# Altium PCB EE_smallOB_BW_v1.0.PcbDoc (part 2 of 4)
Units mil, origin at the board's own origin, x right, y up, seen from the top; angles counter-clockwise.
Board outline 1388 x 1586.96 mil, 4 copper layers (Top Layer, Layer 1, Layer 2, Bottom Layer), stack 37.371 mil thick; 116 components, 102 nets, 640 pads, 211 vias.
Unrouted connection lines stored in the file: 1.
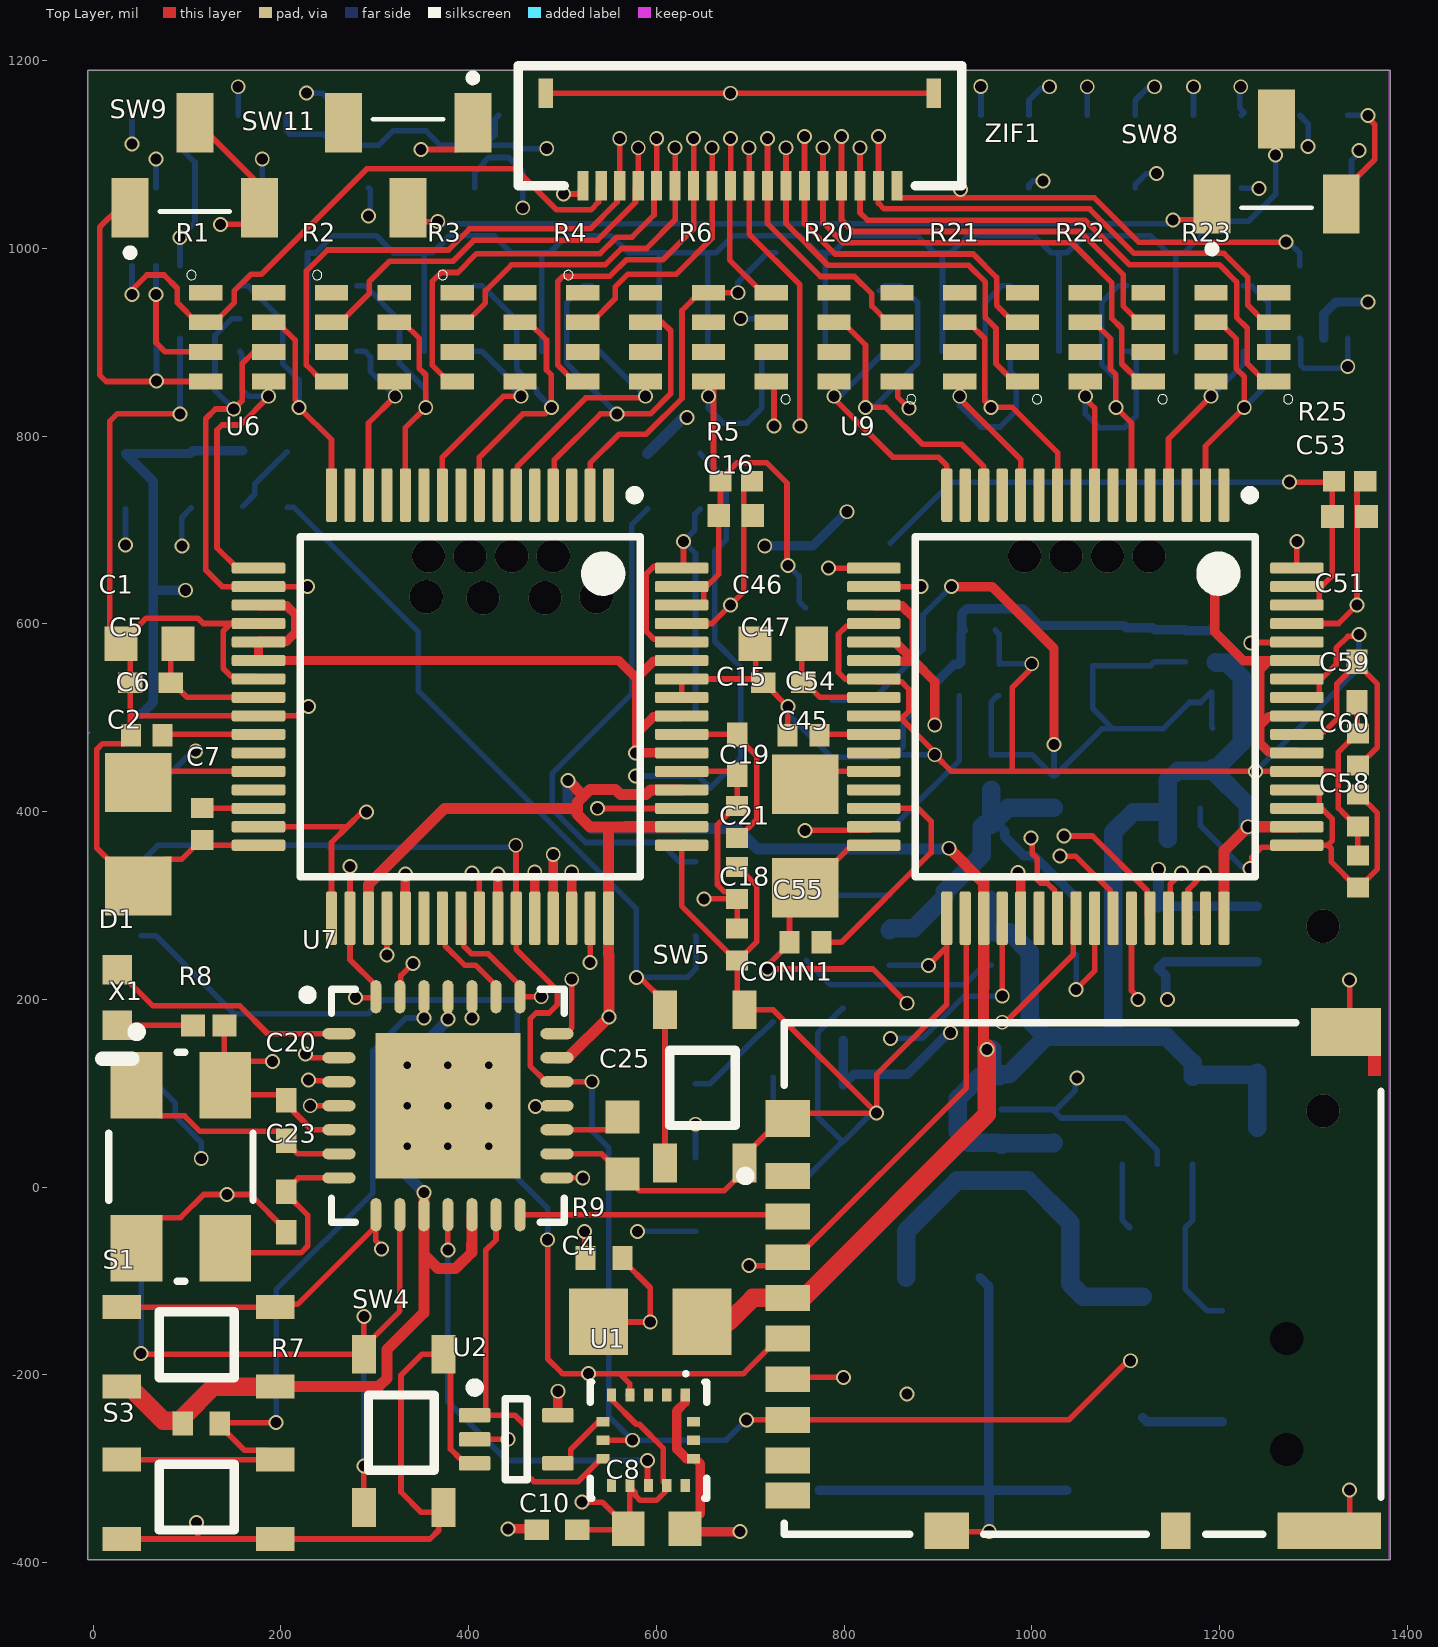
[diagram p0: Top Layer view]

## Part data (continued)
R1 R2 R3 R4 R6 R20 R21 R22 R23: "BOURNS         CAY16-2201F4LF             RESISTOR, ARRAY-4, 2.2KOHM, 5%, SMD", Case/Package=1206, Case Code (Metric)=3216, Manufacturer 1=Bourns, Max Operating Temperature=125°C, Min Operating Temperature=-55°C, Number of Resistors=4, Package Quantity=1, Power Per Element=62.5mW, Power Rating=248mW, Resistance=2.2kR, Supplier Part Number 1=CAY16-2201F4LFCT-ND, Temperature Coefficient=200ppm/°C, Tolerance=1%, Voltage Rating=50V, Case Code (Imperial)=1206, Circuit Type=Isolated, ComponentLink1Description=https://datasheet.ciiva.com/11807/0900766b8064e462-11807027.pdf?src-supplier=RSComponents, ComponentLink1URL=https://datasheet.ciiva.com/11807/0900766b8064e462-11807027.pdf?src-supplier=RSComponents, ComponentLink2Description=https://datasheet.ciiva.com/16967/catcay-16967355.pdf?src-supplier=Avnet+Europe, ComponentLink2URL=https://datasheet.ciiva.com/16967/catcay-16967355.pdf?src-supplier=Avnet+Europe, ComponentLink3Description=https://datasheet.ciiva.com/6533/catcay-6533677.pdf?src-supplier=Digi-Key, ComponentLink3URL=https://datasheet.ciiva.com/6533/catcay-6533677.pdf?src-supplier=Digi-Key, ComponentLink4Description=https://datasheet.ciiva.com/30021/catcay-30021357.pdf?src-supplier=Avnet, ComponentLink4URL=https://datasheet.ciiva.com/30021/catcay-30021357.pdf?src-supplier=Avnet, ComponentLink5Description=https://datasheet.ciiva.com/1478/1849489-1478846.pdf?src-supplier=Element14, ComponentLink5URL=https://datasheet.ciiva.com/1478/1849489-1478846.pdf?src-supplier=Element14, ComponentLink6Description=https://datasheet.ciiva.com/6533/catcay-6533678.pdf?src-supplier=Digi-Key, ComponentLink6URL=https://datasheet.ciiva.com/6533/catcay-6533678.pdf?src-supplier=Digi-Key, ComponentLink7Description=https://datasheet.ciiva.com/1478/1849489-1478847.pdf?src-supplier=Element14, ComponentLink7URL=https://datasheet.ciiva.com/1478/1849489-1478847.pdf?src-supplier=Element14, ComponentLink8Description=https://datasheet.ciiva.com/6533/catcay-6533679.pdf?src-supplier=Digi-Key, ComponentLink8URL=https://datasheet.ciiva.com/6533/catcay-6533679.pdf?src-supplier=Digi-Key, ComponentLink9Description=https://datasheet.ciiva.com/48692/001055385-da-01-en-wid-arr-cay16-2201f4lf-2-2k-ohm-4-w-1206-48692149.pdf?src-supplier=Conrad, ComponentLink9URL=https://datasheet.ciiva.com/48692/001055385-da-01-en-wid-arr-cay16-2201f4lf-2-2k-ohm-4-w-1206-48692149.pdf?src-supplier=Conrad, Contact Plating=Tin, Depth=1.6mm, Height=0.024inch, Lead Free="Lead Free", Lead Pitch=0.8mm, Length=3.2mm, Manufacturer Part Number 1=CAY16-2201F4LF, Military Standard=Not, Mount="Surface Mount", Number of Circuits=4, Number of Elements=4, Number of Pins=8, Number of Terminals=8, Packaging="Tape and Reel", Pricing 1="1=0.14000, 10=0.12100, 25=0.08800, 50=0.06380, 100=0.04730, 250=0.03632, 500=0.02860, 1000=0.01980 (USD)", REACH SVHC="No SVHC", RoHS=Yes, Stock 1=35310, Supplier 1=Digi-Key, Terminal Pitch=0.8mm, Termination=Convex, Voltage Rating (DC)=50V, Width=0.063inch
R5 R25: "RES SMD 1M OHM 5% 1/16W 0402", Case/Package=0402, Case Code (Metric)=1005, Manufacturer 1=Yageo, Max Operating Temperature=155°C, Max Power Dissipation=63mW, Min Operating Temperature=-55°C, Package Quantity=1, Power Rating=62.5mW, Resistance=1MR, Supplier Part Number 1=311-1.0MJRCT-ND, Temperature Coefficient=100ppm/°C, Tolerance=5%, Voltage Rating=50V, Case Code (Imperial)=0402, ComponentLink1Description=https://datasheet.ciiva.com/2452/pyu-r-int-thick-7-2452736.pdf?src-supplier=Digi-Key, ComponentLink1URL=https://datasheet.ciiva.com/2452/pyu-r-int-thick-7-2452736.pdf?src-supplier=Digi-Key, ComponentLink2Description=https://datasheet.ciiva.com/7983/1018594-7983560.pdf?src-supplier=Element14, ComponentLink2URL=https://datasheet.ciiva.com/7983/1018594-7983560.pdf?src-supplier=Element14, ComponentLink3Description=https://datasheet.ciiva.com/12577/pyu-rc0402-51-rohs-l-6-r-12577354.pdf?src-supplier=Mouser, ComponentLink3URL=https://datasheet.ciiva.com/12577/pyu-rc0402-51-rohs-l-6-r-12577354.pdf?src-supplier=Mouser, ComponentLink4Description=https://datasheet.ciiva.com/17085/pyu-rc0402-51-rohs-l-6-r-17085739.pdf?src-supplier=Future+Electronics, ComponentLink4URL=https://datasheet.ciiva.com/17085/pyu-rc0402-51-rohs-l-6-r-17085739.pdf?src-supplier=Future+Electronics, ComponentLink5Description=https://datasheet.ciiva.com/7850/1018594-7850172.pdf?src-supplier=Element14, ComponentLink5URL=https://datasheet.ciiva.com/7850/1018594-7850172.pdf?src-supplier=Element14, ComponentLink6Description=https://datasheet.ciiva.com/7850/1018594-7850173.pdf?src-supplier=Element14, ComponentLink6URL=https://datasheet.ciiva.com/7850/1018594-7850173.pdf?src-supplier=Element14, ComponentLink7Description=https://datasheet.ciiva.com/2452/pyu-r-int-thick-7-2452734.pdf?src-supplier=Digi-Key, ComponentLink7URL=https://datasheet.ciiva.com/2452/pyu-r-int-thick-7-2452734.pdf?src-supplier=Digi-Key, ComponentLink8Description=https://datasheet.ciiva.com/2452/pyu-r-int-thick-7-2452735.pdf?src-supplier=Digi-Key, ComponentLink8URL=https://datasheet.ciiva.com/2452/pyu-r-int-thick-7-2452735.pdf?src-supplier=Digi-Key, Composition="Thick Film", Depth=0.5mm, Features="Moisture Resistant", Height=0.016inch, Lead Free="Lead Free", Length=1mm, Manufacturer Part Number 1=RC0402JR-071ML, Military Standard=Not, Number of Terminations=2, Packaging="Tape and Reel", Pricing 1="1=0.10000, 10=0.01300, 100=0.00550, 1000=0.00245, 2500=0.00212, 5000=0.00176 (USD)", REACH SVHC="No SVHC", RoHS=Yes, Stock 1=2568291, Supplier 1=Digi-Key, Termination=SMD/SMT, Weight=2.3E-05oz, Width=0.02inch
R7 R9: "RES SMD 470K OHM 5% 1/16W 0402", Case/Package=0402, Case Code (Metric)=1005, Manufacturer 1=Yageo, Max Operating Temperature=155°C, Max Power Dissipation=63mW, Min Operating Temperature=-55°C, Package Quantity=10000, Power Rating=62.5mW, Resistance=470kR, Supplier Part Number 1=311-470KJRCT-ND, Temperature Coefficient=100ppm/°C, Tolerance=5%, Voltage Rating=50V, Case Code (Imperial)=0402, ComponentLink1Description=https://datasheet.ciiva.com/2452/pyu-r-int-thick-7-2452629.pdf?src-supplier=Digi-Key, ComponentLink1URL=https://datasheet.ciiva.com/2452/pyu-r-int-thick-7-2452629.pdf?src-supplier=Digi-Key, ComponentLink2Description=https://datasheet.ciiva.com/2452/pyu-r-int-thick-7-2452630.pdf?src-supplier=Digi-Key, ComponentLink2URL=https://datasheet.ciiva.com/2452/pyu-r-int-thick-7-2452630.pdf?src-supplier=Digi-Key, ComponentLink3Description=https://datasheet.ciiva.com/7850/1018594-7850214.pdf?src-supplier=Element14, ComponentLink3URL=https://datasheet.ciiva.com/7850/1018594-7850214.pdf?src-supplier=Element14, ComponentLink4Description=https://datasheet.ciiva.com/2452/pyu-r-int-thick-7-2452631.pdf?src-supplier=Digi-Key, ComponentLink4URL=https://datasheet.ciiva.com/2452/pyu-r-int-thick-7-2452631.pdf?src-supplier=Digi-Key, ComponentLink5Description=https://datasheet.ciiva.com/7850/1018594-7850215.pdf?src-supplier=Element14, ComponentLink5URL=https://datasheet.ciiva.com/7850/1018594-7850215.pdf?src-supplier=Element14, ComponentLink6Description=https://datasheet.ciiva.com/12667/pyu-rc0402-51-rohs-l-6-r-12667098.pdf?src-supplier=Mouser, ComponentLink6URL=https://datasheet.ciiva.com/12667/pyu-rc0402-51-rohs-l-6-r-12667098.pdf?src-supplier=Mouser, Composition="Thick Film", Depth=0.5mm, Features="Moisture Resistant", Height=0.016inch, Lead Free="Lead Free", Length=1mm, Manufacturer Part Number 1=RC0402JR-07470KL, Military Standard=Not, Number of Terminations=2, Packaging="Tape and Reel", Pricing 1="1=0.10000, 10=0.01300, 100=0.00550, 1000=0.00245, 2500=0.00212, 5000=0.00176 (USD)", REACH SVHC="No SVHC", RoHS=Yes, Stock 1=1799220, Supplier 1=Digi-Key, Termination=SMD/SMT, Width=0.02inch, Working Voltage=50V
R8: "Res Thin Film 0402 1K Ohm 1% 0.063W(1/16W) ???}50ppm/???? Molded SMD Paper T/R", Case/Package=0402, Case Code (Metric)=1005, Manufacturer 1=Yageo, Max Operating Temperature=125°C, Max Power Dissipation=63mW, Min Operating Temperature=-55°C, Package Quantity=10000, Power Rating=62.5mW, Resistance=1kR, Supplier Part Number 1=YAG1234CT-ND, Temperature Coefficient=50ppm/°C, Tolerance=1%, Voltage Rating=50V, Case Code (Imperial)=0402, ComponentLink1Description=https://datasheet.ciiva.com/12834/pyu-rt-1-to-0-05-rohs-l-4-12834181.pdf?src-supplier=Mouser, ComponentLink1URL=https://datasheet.ciiva.com/12834/pyu-rt-1-to-0-05-rohs-l-4-12834181.pdf?src-supplier=Mouser, ComponentLink2Description=https://datasheet.ciiva.com/25647/pyu-rt-1-to-0-05-rohs-l-4-25647306.pdf?src-supplier=Digi-Key, ComponentLink2URL=https://datasheet.ciiva.com/25647/pyu-rt-1-to-0-05-rohs-l-4-25647306.pdf?src-supplier=Digi-Key, ComponentLink3Description=https://datasheet.ciiva.com/8896/pyu-rt-1-to-0-05-rohs-l-4-8896188.pdf?src-supplier=Avnet, ComponentLink3URL=https://datasheet.ciiva.com/8896/pyu-rt-1-to-0-05-rohs-l-4-8896188.pdf?src-supplier=Avnet, Composition="Thin Film", Contact Plating=Tin,Matte,Lead, Depth=0.5mm, Features="Moisture Resistant", Height=0.014inch, Lead Free="Lead Free", Length=1mm, Manufacturer Part Number 1=RT0402FRE071KL, Military Standard=Not, Number of Terminations=2, Packaging="Tape and Reel", Pricing 1="1=0.10000, 10=0.07200, 100=0.02770, 1000=0.01220, 2500=0.01053, 5000=0.00942 (USD)", Radiation Hardening=No, RoHS=Yes, Stock 1=113931, Supplier 1=Digi-Key, Termination=SMD/SMT, Voltage Rating (DC)=50V, Width=0.02inch
R12 R13 R16 R17 R18: library part ERJ-3EKF1002V, "Res Thick Film 0603 10K Ohm 1% 1/10W ±100ppm/°C Molded SMD Punched Carrier T/R", Case/Package=0603, Case Code (Metric)=1608, Manufacturer 1=Panasonic, Max Operating Temperature=155°C, Max Power Dissipation=100mW, Min Operating Temperature=-55°C, Package Quantity=1, Resistance=10kR, Temperature Coefficient=100ppm/°C, Tolerance=1%, Voltage Rating=75V, Case Code (Imperial)=0603, ComponentLink1Description=http://www.farnell.com/datasheets/1911175.pdf?src-supplier=Farnell, ComponentLink1URL=http://www.farnell.com/datasheets/1911175.pdf?src-supplier=Farnell, ComponentLink2Description=http://components.arrow.com/part/dataview/0323_02069964?src-supplier=Arrow+Europe, ComponentLink2URL=http://components.arrow.com/part/dataview/0323_02069964?src-supplier=Arrow+Europe, ComponentLink3Description=https://industrial.panasonic.com/cdbs/www-data/pdf/RDA0000/DMA0000COL11.pdf?src-supplier=Distrelec, ComponentLink3URL=https://industrial.panasonic.com/cdbs/www-data/pdf/RDA0000/DMA0000COL11.pdf?src-supplier=Distrelec, ComponentLink4Description=https://industrial.panasonic.com/cdbs/www-data/pdf/RDA0000/DMA0000COL11.pdf?src-supplier=Future+Electronics, ComponentLink4URL=https://industrial.panasonic.com/cdbs/www-data/pdf/RDA0000/DMA0000COL11.pdf?src-supplier=Future+Electronics, ComponentLink5Description=http://www.jameco.com/Jameco/Products/ProdDS/1987468.pdf?src-supplier=Jameco, ComponentLink5URL=http://www.jameco.com/Jameco/Products/ProdDS/1987468.pdf?src-supplier=Jameco, ComponentLink6Description=https://industrial.panasonic.com/cdbs/www-data/pdf/RDA0000/DMA0000COL11.pdf?src-supplier=Allied+Electronics, ComponentLink6URL=https://industrial.panasonic.com/cdbs/www-data/pdf/RDA0000/DMA0000COL11.pdf?src-supplier=Allied+Electronics, ComponentLink7Description=https://industrial.panasonic.com/cdbs/www-data/pdf/RDA0000/DMA0000COL11.pdf?src-supplier=Conrad, ComponentLink7URL=https://industrial.panasonic.com/cdbs/www-data/pdf/RDA0000/DMA0000COL11.pdf?src-supplier=Conrad, Composition="Thick Film", Contact Plating=Tin, Depth=0.8mm, Features="Automotive AEC-Q200", Height=0.45mm, Lead Free="Lead Free", Length=1.6mm, Manufacturer Part Number 1=ERJ-3EKF1002V, Military Standard=Not, Mount="Surface Mount", Number of Pins=2, Number of Terminations=2, Packaging="Tape and Reel", Power Rating=100mW, Pricing 1="1=0.10000, 10=0.06500, 100=0.02640, 1000=0.01186, 2500=0.01029 (USD)", Radiation Hardening=No, REACH SVHC="No SVHC", RoHS=Yes, Stock 1=6176372, Supplier 1=Digi-Key, Termination=SMD/SMT, Voltage Rating (DC)=75V, Width=0.031inch
R14 R15: library part ERJ3EKF1001V, "Res Thick Film 0603 1K Ohm 1% 1/10W ±100ppm/°C Molded SMD Punched Carrier T/R", Case/Package=0603, Case Code (Metric)=1608, Manufacturer 1=Panasonic, Max Operating Temperature=155°C, Max Power Dissipation=100mW, Min Operating Temperature=-55°C, Package Quantity=5000, Resistance=1kR, Temperature Coefficient=100ppm/°C, Tolerance=1%, Voltage Rating=75V, Case Code (Imperial)=0603, ComponentLink1Description=https://datasheet.ciiva.com/16768/70260748-16768437.pdf?src-supplier=Allied+Electronics, ComponentLink1URL=https://datasheet.ciiva.com/16768/70260748-16768437.pdf?src-supplier=Allied+Electronics, ComponentLink2Description=https://datasheet.ciiva.com/16774/70260748-16774550.pdf?src-supplier=Allied+Electronics, ComponentLink2URL=https://datasheet.ciiva.com/16774/70260748-16774550.pdf?src-supplier=Allied+Electronics, ComponentLink3Description=https://datasheet.ciiva.com/16449/aoa0000ce2-16449065.pdf?src-supplier=Future+Electronics, ComponentLink3URL=https://datasheet.ciiva.com/16449/aoa0000ce2-16449065.pdf?src-supplier=Future+Electronics, ComponentLink4Description=https://datasheet.ciiva.com/7942/aoa0000ce2-7942427.pdf?src-supplier=Element14, ComponentLink4URL=https://datasheet.ciiva.com/7942/aoa0000ce2-7942427.pdf?src-supplier=Element14, ComponentLink5Description=https://datasheet.ciiva.com/9198/aoa0000ce2-9198923.pdf?src-supplier=Avnet, ComponentLink5URL=https://datasheet.ciiva.com/9198/aoa0000ce2-9198923.pdf?src-supplier=Avnet, ComponentLink6Description=https://datasheet.ciiva.com/46373/1678782-46373339.pdf?src-supplier=Element14, ComponentLink6URL=https://datasheet.ciiva.com/46373/1678782-46373339.pdf?src-supplier=Element14, ComponentLink7Description=https://datasheet.ciiva.com/48530/aoa0000ce2-48530987.pdf?src-supplier=Avnet, ComponentLink7URL=https://datasheet.ciiva.com/48530/aoa0000ce2-48530987.pdf?src-supplier=Avnet, ComponentLink8Description=https://datasheet.ciiva.com/46373/1678782-46373340.pdf?src-supplier=Element14, ComponentLink8URL=https://datasheet.ciiva.com/46373/1678782-46373340.pdf?src-supplier=Element14, ComponentLink9Description=https://datasheet.ciiva.com/24070/aoa0000ce2-24070269.pdf?src-supplier=Mouser, ComponentLink9URL=https://datasheet.ciiva.com/24070/aoa0000ce2-24070269.pdf?src-supplier=Mouser, ComponentLink10Description=https://datasheet.ciiva.com/22673/1678782-22673918.pdf?src-supplier=Element14, ComponentLink10URL=https://datasheet.ciiva.com/22673/1678782-22673918.pdf?src-supplier=Element14, ComponentLink11Description=https://datasheet.ciiva.com/30063/aoa0000ce2-30063390.pdf?src-supplier=Onlinecomponents.com, ComponentLink11URL=https://datasheet.ciiva.com/30063/aoa0000ce2-30063390.pdf?src-supplier=Onlinecomponents.com, ComponentLink12Description=https://datasheet.ciiva.com/17215/aoa0000ce2-17215311.pdf?src-supplier=Avnet+Europe, ComponentLink12URL=https://datasheet.ciiva.com/17215/aoa0000ce2-17215311.pdf?src-supplier=Avnet+Europe, Composition="Thick Film", Contact Plating=Tin, Depth=0.8mm, Features="Automotive AEC-Q200", Height=0.45mm, Lead Free="Lead Free", Length=1.6mm, Manufacturer Part Number 1=ERJ3EKF1001V, Military Standard=Not, Mount="Surface Mount", Number of Pins=2, Number of Terminations=2, Packaging="Tape and Reel", Power Rating=100mW, Pricing 1="1=0.100000, 10=0.055000, 100=0.022400, 1000=0.010050, 2500=0.008720 (USD)", Radiation Hardening=No, REACH SVHC="No SVHC", RoHS=Yes, Stock 1=7716058, Supplier 1=Digi-Key, Termination=SMD/SMT, Voltage Rating (DC)=75V, Width=0.8mm
S1 S3 SW4 SW5: "SWITCH TACTILE SPST-NO 0.05A 16V", Case/Package=SMD/SMT, Color=White, Current Rating=50mA, Manufacturer 1="ITT C&K", Max Operating Temperature=85°C, Min Operating Temperature=-40°C, Operating Force=260gf, Package Quantity=1, Supplier Part Number 1=CKN10503CT-ND, Voltage Rating (DC)=16V, Actuator Type=Standard, ComponentLink1Description=https://datasheet.ciiva.com/18514/pts810-4mar13-18514061.pdf?src-supplier=Digi-Key, ComponentLink1URL=https://datasheet.ciiva.com/18514/pts810-4mar13-18514061.pdf?src-supplier=Digi-Key, ComponentLink2Description=https://datasheet.ciiva.com/18514/pts810-4mar13-18514063.pdf?src-supplier=Digi-Key, ComponentLink2URL=https://datasheet.ciiva.com/18514/pts810-4mar13-18514063.pdf?src-supplier=Digi-Key, ComponentLink3Description=https://datasheet.ciiva.com/18514/pts810-4mar13-18514062.pdf?src-supplier=Digi-Key, ComponentLink3URL=https://datasheet.ciiva.com/18514/pts810-4mar13-18514062.pdf?src-supplier=Digi-Key, Contact Plating=Silver, Depth=4.6mm, Illumination Type=Non-Illuminated, Lead Free="Lead Free", Length=3.2mm, Manufacturer Part Number 1=PTS810SJK250SMTRLFS, Max Current Rating=50mA, Mechanical Life=50000Cycles, Mount="Surface Mount", Orientation=Straight, Packaging="Tape and Reel", Pricing 1="1=0.30000, 10=0.28700, 25=0.27680, 50=0.26700, 100=0.25210, 250=0.23728, 500=0.22740, 1000=0.17302 (USD)", RoHS=Yes, Stock 1=61508, Supplier 1=Digi-Key, Switch Function=Off-Mom, Switch Travel=0.15mm, Termination=J-Bend, Throw Configuration=SPST
SW2: "SWITCH SLIDE SP3T 300MA 4V", Current Rating=300mA, Manufacturer 1="Nidec Copal", Max Operating Temperature=70°C, Max Voltage Rating (DC)=20V, Min Operating Temperature=-20°C, Supplier Part Number 1=563-1103-1-ND, Voltage Rating (DC)=4V, Actuator Length=1.5mm, Actuator Material=Nylon,Polyamide, Actuator Type=Standard, ComponentLink1Description=https://datasheet.ciiva.com/2889/cus-2889142.pdf?src-supplier=Digi-Key, ComponentLink1URL=https://datasheet.ciiva.com/2889/cus-2889142.pdf?src-supplier=Digi-Key, ComponentLink2Description=https://datasheet.ciiva.com/2889/cus-2889143.pdf?src-supplier=Digi-Key, ComponentLink2URL=https://datasheet.ciiva.com/2889/cus-2889143.pdf?src-supplier=Digi-Key, ComponentLink3Description=https://datasheet.ciiva.com/2889/cus-2889144.pdf?src-supplier=Digi-Key, ComponentLink3URL=https://datasheet.ciiva.com/2889/cus-2889144.pdf?src-supplier=Digi-Key, Contact Material="Copper Alloy", Contact Plating=Gold, Electrical Life=10000Cycles, Manufacturer Part Number 1=CUS-13TB, Mount="Surface Mount", Orientation="Right Angle", Packaging="Tape and Reel", Pricing 1="1=0.74000, 10=0.71200, 25=0.69760, 50=0.62320, 100=0.59360, 250=0.57876, 500=0.48972, 1000=0.47488 (USD)", Radiation Hardening=No, RoHS=Yes, Stock 1=8665, Supplier 1=Digi-Key, Switch Function=On-On-On, Switch Travel=1.5mm, Termination="Gull Wing", Throw Configuration=SP3T
SW6: library part PCM12SMTR, "C & K COMPONENTS - PCM12SMTR - SWITCH, SPDT, 0.3A, 6VDC, SMD", Contact Current Rating=300mA, Contact Resistance=70mR, Insulation Resistance=100mR, Manufacturer 1="ITT C&K", Max Operating Temperature=85°C, Max Voltage Rating (DC)=6V, Min Operating Temperature=-20°C, Package Quantity=1, Supplier Part Number 1=401-2016-1-ND, Actuator Length=1.5mm, Actuator Material=Nylon,Polyamide, Actuator Type=Standard, ComponentLink1Description=https://datasheet.ciiva.com/16462/pcm-13nov13-16462516.pdf?src-supplier=Avnet+Asia, ComponentLink1URL=https://datasheet.ciiva.com/16462/pcm-13nov13-16462516.pdf?src-supplier=Avnet+Asia, ComponentLink2Description=https://datasheet.ciiva.com/16475/pcm12smtr-16475766.pdf?src-supplier=Future+Electronics, ComponentLink2URL=https://datasheet.ciiva.com/16475/pcm12smtr-16475766.pdf?src-supplier=Future+Electronics, ComponentLink3Description=https://datasheet.ciiva.com/16174/pcm-30mar11-16174552.pdf?src-supplier=Onlinecomponents.com, ComponentLink3URL=https://datasheet.ciiva.com/16174/pcm-30mar11-16174552.pdf?src-supplier=Onlinecomponents.com, ComponentLink4Description=https://datasheet.ciiva.com/1532/1685524-1532411.pdf?src-supplier=Element14, ComponentLink4URL=https://datasheet.ciiva.com/1532/1685524-1532411.pdf?src-supplier=Element14, ComponentLink5Description=https://datasheet.ciiva.com/5279/pcm-5oct11-24112-5279535.pdf?src-supplier=Mouser, ComponentLink5URL=https://datasheet.ciiva.com/5279/pcm-5oct11-24112-5279535.pdf?src-supplier=Mouser, ComponentLink6Description=https://datasheet.ciiva.com/2889/pcm-13nov13-2889154.pdf?src-supplier=Digi-Key, ComponentLink6URL=https://datasheet.ciiva.com/2889/pcm-13nov13-2889154.pdf?src-supplier=Digi-Key, ComponentLink7Description=https://datasheet.ciiva.com/2889/pcm-13nov13-2889155.pdf?src-supplier=Digi-Key, ComponentLink7URL=https://datasheet.ciiva.com/2889/pcm-13nov13-2889155.pdf?src-supplier=Digi-Key, ComponentLink8Description=https://datasheet.ciiva.com/2889/pcm-13nov13-2889156.pdf?src-supplier=Digi-Key, ComponentLink8URL=https://datasheet.ciiva.com/2889/pcm-13nov13-2889156.pdf?src-supplier=Digi-Key, Contact Material="Copper Alloy,Copper,Silver", Contact Plating=Silver, Current Rating=300mA, Depth=5mm, Lead Free="Lead Free", Length=7.7mm, Manufacturer Part Number 1=PCM12SMTR, Max Current Rating=300mA, Mechanical Life=10000Cycles, Mount="Surface Mount", Orientation="Right Angle", Packaging="Tape and Reel", Pricing 1="1=0.91000, 10=0.87000, 25=0.85240, 50=0.76160, 100=0.72530, 250=0.70720, 500=0.59840, 1000=0.58027 (USD)", REACH SVHC="No SVHC", RoHS=Yes, Stock 1=24379, Supplier 1=Digi-Key, Switch Function=On-On, Switch Travel=1.5mm, Termination="Gull Wing", Throw Configuration=SPDT, Voltage Rating (AC)=6V, Voltage Rating (DC)=6V, Width=6.7mm
SW8 SW9 SW10 SW11: "SWITCH SLIDE SPDT 100MA 6V", Current Rating=100mA, Manufacturer 1="Nidec Copal", Max Operating Temperature=85°C, Max Voltage Rating (DC)=24V, Min Operating Temperature=-40°C, Supplier Part Number 1=563-1021-1-ND, Voltage Rating (DC)=6V, Actuator Type="Slide (Standard)", Body Material=Polyphenylene, ComponentLink1Description=https://datasheet.ciiva.com/2864/cjs-2864476.pdf?src-supplier=Digi-Key, ComponentLink1URL=https://datasheet.ciiva.com/2864/cjs-2864476.pdf?src-supplier=Digi-Key, ComponentLink2Description=https://datasheet.ciiva.com/2864/cjs-2864477.pdf?src-supplier=Digi-Key, ComponentLink2URL=https://datasheet.ciiva.com/2864/cjs-2864477.pdf?src-supplier=Digi-Key, ComponentLink3Description=https://datasheet.ciiva.com/2864/cjs-2864478.pdf?src-supplier=Digi-Key, ComponentLink3URL=https://datasheet.ciiva.com/2864/cjs-2864478.pdf?src-supplier=Digi-Key, Contact Material="Copper Alloy", Contact Plating=Gold, Electrical Life=200Cycles, Lead Free="Lead Free", Length=0.212inch, Manufacturer Part Number 1=CJS-1200TA, Mount="Surface Mount", Number of Positions=2, Orientation=Vertical, Packaging="Tape and Reel", Pricing 1="1=0.88000, 10=0.86000, 25=0.81000, 50=0.76040, 100=0.72730, 250=0.69428, 500=0.62814 (USD)", Radiation Hardening=No, RoHS=Yes, Stock 1=72766, Supplier 1=Digi-Key, Termination=J-Hook, Throw Configuration=SPDT, Washable=Yes
U1: "ACCEL 2-16G I2C/SPI 16LGA", Case/Package=LGA, Manufacturer 1=STMicroelectronics, Max Operating Temperature=85°C, Max Supply Voltage=3.6V, Min Operating Temperature=-40°C, Min Supply Voltage=1.71V, Operating Supply Current=11uA, Operating Supply Voltage=2.5V, Package Quantity=1, Supplier Part Number 1=497-10613-1-ND, Axis="X, Y, Z", Bandwidth=5kHz, ComponentLink1Description=https://datasheet.ciiva.com/7621/1718591-7621744.pdf?src-supplier=Element14, ComponentLink1URL=https://datasheet.ciiva.com/7621/1718591-7621744.pdf?src-supplier=Element14, ComponentLink2Description=https://datasheet.ciiva.com/16638/cd00274221-16638192.pdf?src-supplier=Avnet+Europe, ComponentLink2URL=https://datasheet.ciiva.com/16638/cd00274221-16638192.pdf?src-supplier=Avnet+Europe, ComponentLink3Description=https://datasheet.ciiva.com/5296/cd00274221-117431-5296513.pdf?src-supplier=Mouser, ComponentLink3URL=https://datasheet.ciiva.com/5296/cd00274221-117431-5296513.pdf?src-supplier=Mouser, ComponentLink4Description=https://datasheet.ciiva.com/26928/lis3dhtr-26928589.pdf?src-supplier=IIIC, ComponentLink4URL=https://datasheet.ciiva.com/26928/lis3dhtr-26928589.pdf?src-supplier=IIIC, ComponentLink5Description=https://datasheet.ciiva.com/2810/cd00274221-2810008.pdf?src-supplier=Digi-Key, ComponentLink5URL=https://datasheet.ciiva.com/2810/cd00274221-2810008.pdf?src-supplier=Digi-Key, ComponentLink6Description=https://datasheet.ciiva.com/2810/cd00274221-2810009.pdf?src-supplier=Digi-Key, ComponentLink6URL=https://datasheet.ciiva.com/2810/cd00274221-2810009.pdf?src-supplier=Digi-Key, ComponentLink7Description=https://datasheet.ciiva.com/48495/cd00274221-48495849.pdf?src-supplier=Avnet, ComponentLink7URL=https://datasheet.ciiva.com/48495/cd00274221-48495849.pdf?src-supplier=Avnet, ComponentLink8Description=https://datasheet.ciiva.com/2810/cd00274221-2810010.pdf?src-supplier=Digi-Key, ComponentLink8URL=https://datasheet.ciiva.com/2810/cd00274221-2810010.pdf?src-supplier=Digi-Key, ComponentLink9Description=https://datasheet.ciiva.com/16216/cd00274221-16216362.pdf?src-supplier=Future+Electronics, ComponentLink9URL=https://datasheet.ciiva.com/16216/cd00274221-16216362.pdf?src-supplier=Future+Electronics, ComponentLink10Description=https://datasheet.ciiva.com/16470/cd00274221-16470411.pdf?src-supplier=Avnet+Asia, ComponentLink10URL=https://datasheet.ciiva.com/16470/cd00274221-16470411.pdf?src-supplier=Avnet+Asia, ComponentLink11Description=https://datasheet.ciiva.com/3271/cd00274221-3271807.pdf?src-supplier=Avnet, ComponentLink11URL=https://datasheet.ciiva.com/3271/cd00274221-3271807.pdf?src-supplier=Avnet, Contact Plating=Gold, Depth=3mm, Height=1mm, Interface=I2C,SPI, Lead Free="Lead Free", Length=3mm, Manufacturer Part Number 1=LIS3DHTR, Max Supply Voltage (DC)=3.6V, Min Supply Voltage (DC)=1.71V, Number of Pins=16, Output Type=Digital, Packaging="Tape and Reel", Pricing 1="1=1.63000, 10=1.46000, 100=1.13850, 500=0.94050, 1000=0.74250 (USD)", Radiation Hardening=No, REACH SVHC="No SVHC", Resolution=16b, RoHS=Yes, Sensor Type="3 Axis", Stock 1=56055, Supplier 1=Digi-Key, Width=3mm
U2: "IC GATE OR 1CH 2-INP SC70-5", Case/Package=SC, High Level Output Current=-32mA, Low Level Output Current=32mA, Manufacturer 1="Texas Instruments", Max Operating Temperature=125°C, Max Supply Voltage=5.5V, Min Operating Temperature=-40°C, Min Supply Voltage=1.65V, Package Quantity=1, Quiescent Current=10uA, Supplier Part Number 1=296-9848-1-ND, ComponentLink1Description=https://datasheet.ciiva.com/1864/sn74lvc1g32-1864192.pdf?src-supplier=Digi-Key, ComponentLink1URL=https://datasheet.ciiva.com/1864/sn74lvc1g32-1864192.pdf?src-supplier=Digi-Key, ComponentLink2Description=https://datasheet.ciiva.com/6124/1768050-6124560.pdf?src-supplier=Farnell, ComponentLink2URL=https://datasheet.ciiva.com/6124/1768050-6124560.pdf?src-supplier=Farnell, ComponentLink3Description=https://datasheet.ciiva.com/15090/getdatasheetpartid-127914-15090759.pdf?src-supplier=Verical, ComponentLink3URL=https://datasheet.ciiva.com/15090/getdatasheetpartid-127914-15090759.pdf?src-supplier=Verical, ComponentLink4Description=https://datasheet.ciiva.com/27049/756781-27049784.pdf?src-supplier=Jameco, ComponentLink4URL=https://datasheet.ciiva.com/27049/756781-27049784.pdf?src-supplier=Jameco, ComponentLink5Description=https://datasheet.ciiva.com/7783/1768050-7783469.pdf?src-supplier=Element14, ComponentLink5URL=https://datasheet.ciiva.com/7783/1768050-7783469.pdf?src-supplier=Element14, ComponentLink6Description=https://datasheet.ciiva.com/14290/sn74lvc1g32-14290781.pdf?src-supplier=Avnet, ComponentLink6URL=https://datasheet.ciiva.com/14290/sn74lvc1g32-14290781.pdf?src-supplier=Avnet, ComponentLink7Description=https://datasheet.ciiva.com/7783/1768050-7783470.pdf?src-supplier=Element14, ComponentLink7URL=https://datasheet.ciiva.com/7783/1768050-7783470.pdf?src-supplier=Element14, ComponentLink8Description=https://datasheet.ciiva.com/26048/sn74lvc1g32-26048814.pdf?src-supplier=Avnet+Europe, ComponentLink8URL=https://datasheet.ciiva.com/26048/sn74lvc1g32-26048814.pdf?src-supplier=Avnet+Europe, ComponentLink9Description=https://datasheet.ciiva.com/1864/sn74lvc1g32-1864193.pdf?src-supplier=Digi-Key, ComponentLink9URL=https://datasheet.ciiva.com/1864/sn74lvc1g32-1864193.pdf?src-supplier=Digi-Key, ComponentLink10Description=https://datasheet.ciiva.com/16503/sn74lvc1g32-16503418.pdf?src-supplier=Avnet+Asia, ComponentLink10URL=https://datasheet.ciiva.com/16503/sn74lvc1g32-16503418.pdf?src-supplier=Avnet+Asia, ComponentLink11Description=https://datasheet.ciiva.com/1864/sn74lvc1g32-1864191.pdf?src-supplier=Digi-Key, ComponentLink11URL=https://datasheet.ciiva.com/1864/sn74lvc1g32-1864191.pdf?src-supplier=Digi-Key, Contact Plating=Gold, Height=0.9mm, Lead Free="Lead Free", Length=2mm, Logic Function=OR, Manufacturer Part Number 1=SN74LVC1G32DCKR, Max Output Current=32mA, Mount="Surface Mount", Number of Bits=1, Number of Circuits=1, Number of Elements=1, Number of Gates=1, Number of Input Lines=2, Number of Inputs=2, Number of Output Lines=1, Number of Outputs=1, Number of Pins=5, Output Current=32mA, Packaging="Tape and Reel", Pricing 1="1=0.33000, 10=0.24700, 100=0.14000, 500=0.09270, 1000=0.07107 (USD)", Propagation Delay=4ns, Radiation Hardening=No, REACH SVHC="No SVHC", RoHS=Yes, Schmitt Trigger Input=No, Stock 1=153903, Supplier 1=Digi-Key, Termination=SMD/SMT, Turn-On Delay Time=4.5ns, Weight=8.8E-05oz, Width=1.25mm
U3: "IC REG SWTCHD CAP INV 40MA SOT23", Case/Package=SOT-23, Frequency=160kHz, Manufacturer 1="TI National Semiconductor", Max Input Voltage=5.5V, Max Operating Temperature=85°C, Max Output Current=40mA, Max Output Voltage=-1.8V, Max Power Dissipation=600mW, Min Input Voltage=1.8V, Min Operating Temperature=-40°C, Min Output Voltage=-5.5V, Nominal Supply Current=500uA, Output Power=500mW, Package Quantity=1000, Supplier Part Number 1=LM2664M6/NOPBCT-ND, ComponentLink1Description=https://datasheet.ciiva.com/1641/1703149-1641090.pdf?src-supplier=Newark, ComponentLink1URL=https://datasheet.ciiva.com/1641/1703149-1641090.pdf?src-supplier=Newark, ComponentLink2Description=https://datasheet.ciiva.com/15114/getdatasheetpartid-117448-15114290.pdf?src-supplier=Verical, ComponentLink2URL=https://datasheet.ciiva.com/15114/getdatasheetpartid-117448-15114290.pdf?src-supplier=Verical, ComponentLink3Description=https://datasheet.ciiva.com/27055/1992911-27055843.pdf?src-supplier=Jameco, ComponentLink3URL=https://datasheet.ciiva.com/27055/1992911-27055843.pdf?src-supplier=Jameco, ComponentLink4Description=https://datasheet.ciiva.com/22669/1811104-22669560.pdf?src-supplier=Element14, ComponentLink4URL=https://datasheet.ciiva.com/22669/1811104-22669560.pdf?src-supplier=Element14, ComponentLink5Description=https://datasheet.ciiva.com/5699/1853535-5699178.pdf?src-supplier=Farnell, ComponentLink5URL=https://datasheet.ciiva.com/5699/1853535-5699178.pdf?src-supplier=Farnell, ComponentLink6Description=https://datasheet.ciiva.com/6579/lm2664-6579834.pdf?src-supplier=Digi-Key, ComponentLink6URL=https://datasheet.ciiva.com/6579/lm2664-6579834.pdf?src-supplier=Digi-Key, ComponentLink7Description=https://datasheet.ciiva.com/6579/lm2664-6579836.pdf?src-supplier=Digi-Key, ComponentLink7URL=https://datasheet.ciiva.com/6579/lm2664-6579836.pdf?src-supplier=Digi-Key, ComponentLink8Description=https://datasheet.ciiva.com/6579/lm2664-6579837.pdf?src-supplier=Digi-Key, ComponentLink8URL=https://datasheet.ciiva.com/6579/lm2664-6579837.pdf?src-supplier=Digi-Key, ComponentLink9Description=https://datasheet.ciiva.com/25902/lm2664-25902046.pdf?src-supplier=Avnet+Europe, ComponentLink9URL=https://datasheet.ciiva.com/25902/lm2664-25902046.pdf?src-supplier=Avnet+Europe, Height=1.02mm, Lead Free="Lead Free", Length=2.92mm, Logic Function=Inverting, Manufacturer Part Number 1=LM2664M6/NOPB, Max Supply Voltage=5.5V, Min Supply Voltage=1.8V, Mount="Surface Mount", Number of Outputs=1, Number of Pins=6, Output Current=40mA, Output Type=Adjustable, Output Voltage=-5.5V, Packaging="Tape and Reel", Pricing 1="1=0.89000, 10=0.79300, 100=0.61830, 500=0.51078 (USD)", Radiation Hardening=No, REACH SVHC="No SVHC", RoHS=Yes, Stock 1=24349, Supplier 1=Digi-Key, Switching Frequency=160kHz, Termination=SMD/SMT, Topology=Buck-Boost, Width=1.6mm
U4: "LDO Regulator Pos 2.5V 0.2A 5-Pin SOT T/R", Case/Package=SOT-23-5, Dropout Voltage=175mV, Manufacturer 1="Texas Instruments", Max Input Voltage=5.5V, Max Operating Temperature=125°C, Max Output Current=200mA, Max Output Voltage=2.5V, Max Power Dissipation=500mW, Min Current Limit=220mA, Min Input Voltage=2V, Min Operating Temperature=-40°C, Output Voltage Accuracy=2%, Package Quantity=1, Quiescent Current=30uA, Supplier Part Number 1=296-36764-1-ND, Accuracy=2%, ComponentLink1Description=https://datasheet.ciiva.com/29568/tlv70025-q1-29568375.pdf?src-supplier=Digi-Key, ComponentLink1URL=https://datasheet.ciiva.com/29568/tlv70025-q1-29568375.pdf?src-supplier=Digi-Key, ComponentLink2Description=https://datasheet.ciiva.com/12958/slvsa61c-120807-12958385.pdf?src-supplier=Mouser, ComponentLink2URL=https://datasheet.ciiva.com/12958/slvsa61c-120807-12958385.pdf?src-supplier=Mouser, Lead Free="Lead Free", Manufacturer Part Number 1=TLV70025QDDCRQ1, Min Output Voltage=2.5V, Number of Outputs=1, Number of Pins=5, Number of Regulators=1, Output Current=200mA, Output Type=Fixed, Output Voltage=2.5V, Packaging="Tape and Reel", Polarity=Positive, Power Dissipation=500mW, Pricing 1="1=0.65000, 10=0.55200, 100=0.41240, 500=0.32404, 1000=0.25039 (USD)", Radiation Hardening=No, RoHS=Yes, Stock 1=2422, Supplier 1=Digi-Key
U6 U9: "IC AFE 24BIT 16KSPS LN 64TQFP", Case/Package=TQFP, Manufacturer 1="Texas Instruments", Max Operating Temperature=85°C, Max Power Dissipation=42mW, Max Supply Voltage=5.25V, Min Operating Temperature=-40°C, Min Supply Voltage=4.75V, Operating Supply Current=7.14mA, Package Quantity=160, Power Consumption=41mW, Supplier Part Number 1=296-35009-ND, ComponentLink1Description=https://datasheet.ciiva.com/13063/ads1299-224171-13063283.pdf?src-supplier=Mouser, ComponentLink1URL=https://datasheet.ciiva.com/13063/ads1299-224171-13063283.pdf?src-supplier=Mouser, ComponentLink2Description=https://datasheet.ciiva.com/26913/getdatasheetpartid-563195-26913237.pdf?src-supplier=Verical, ComponentLink2URL=https://datasheet.ciiva.com/26913/getdatasheetpartid-563195-26913237.pdf?src-supplier=Verical, ComponentLink3Description=https://datasheet.ciiva.com/6668/ads1299-6668469.pdf?src-supplier=Digi-Key, ComponentLink3URL=https://datasheet.ciiva.com/6668/ads1299-6668469.pdf?src-supplier=Digi-Key, Contact Plating=Gold, Conversion Rate=16KS/s, Interface=SPI, Lead Free="Lead Free", Manufacturer Part Number 1=ADS1299IPAG, Number of A/D Converters=8, Number of Bits=24, Number of Channels=8, Number of Converters=8, Number of Inputs=8, Number of Pins=64, Packaging=Rail/Tube, Pricing 1="1=55.18000, 10=51.83200, 25=50.16000, 100=46.48160 (USD)", Radiation Hardening=No, REACH SVHC="No SVHC", Resolution=24b, RoHS=Yes, Sampling Rate=16KS/s, Signal to Noise Ratio (SNR)=121dB, Stock 1=447, Supplier 1=Digi-Key, Type="General Purpose"
U7: "IC MCU 32BIT 128KB FLASH 28QFN", Case/Package=QFN, Frequency=40MHz, Manufacturer 1=Microchip, Max Operating Temperature=85°C, Max Supply Voltage=3.6V, Min Operating Temperature=-40°C, Min Supply Voltage=2.3V, Package Quantity=61, Supplier Part Number 1=PIC32MX250F128B-I/ML-ND, ComponentLink1Description=https://datasheet.ciiva.com/1580/61168e-1580882.pdf?src-supplier=Digi-Key, ComponentLink1URL=https://datasheet.ciiva.com/1580/61168e-1580882.pdf?src-supplier=Digi-Key, ComponentLink2Description=https://datasheet.ciiva.com/9242/61168d-9242380.pdf?src-supplier=Avnet, ComponentLink2URL=https://datasheet.ciiva.com/9242/61168d-9242380.pdf?src-supplier=Avnet, ComponentLink3Description=https://datasheet.ciiva.com/16476/61168e-16476910.pdf?src-supplier=Future+Electronics, ComponentLink3URL=https://datasheet.ciiva.com/16476/61168e-16476910.pdf?src-supplier=Future+Electronics, Core Architecture=PIC, Data Bus Width=32b, Interface=I2C,SPI,USB,IrDA,UART,USART,LIN,I2S, Lead Free="Lead Free", Manufacturer Part Number 1=PIC32MX250F128B-I/ML, Max Frequency=40MHz, Memory Size=128KB, Memory Type=FLASH, Number of Pins=28, Number of Programmable I/O=19, Number of Timers/Counters=5, Number of UART Channels=2, Packaging=Rail/Tube, Peripherals=I2C, Pricing 1="1=3.79000, 25=3.47120, 100=3.15180 (USD)", Radiation Hardening=No, RAM Size=32KB, RoHS=Yes, Stock 1=1377, Supplier 1=Digi-Key, Watchdog Timer=Yes
U8: "IC REG LINEAR 3.3V 600MA SOT25", Case/Package=SOT-23-5, Dropout Voltage=250mV, Manufacturer 1=Diodes, Max Input Voltage=6V, Max Operating Temperature=85°C, Max Output Current=600mA, Min Input Voltage=2.5V, Min Operating Temperature=-40°C, Output Voltage=3.3V, Package Quantity=1, Quiescent Current=55uA, Supplier Part Number 1=AP2112K-3.3TRG1DICT-ND, Accuracy=1.5%, ComponentLink1Description=https://datasheet.ciiva.com/30016/ap2112-30016792.pdf?src-supplier=Avnet, ComponentLink1URL=https://datasheet.ciiva.com/30016/ap2112-30016792.pdf?src-supplier=Avnet, ComponentLink2Description=https://datasheet.ciiva.com/29569/ap2112-29569917.pdf?src-supplier=Digi-Key, ComponentLink2URL=https://datasheet.ciiva.com/29569/ap2112-29569917.pdf?src-supplier=Digi-Key, ComponentLink3Description=https://datasheet.ciiva.com/29569/ap2112-29569918.pdf?src-supplier=Digi-Key, ComponentLink3URL=https://datasheet.ciiva.com/29569/ap2112-29569918.pdf?src-supplier=Digi-Key, ComponentLink4Description=https://datasheet.ciiva.com/29569/ap2112-29569919.pdf?src-supplier=Digi-Key, ComponentLink4URL=https://datasheet.ciiva.com/29569/ap2112-29569919.pdf?src-supplier=Digi-Key, Height=1.3mm, Lead Free="Lead Free", Length=3.1mm, Manufacturer Part Number 1=AP2112K-3.3TRG1, Mount="Surface Mount", Number of Outputs=1, Number of Pins=5, Number of Regulators=1, Output Current=600mA, Output Type=Fixed, Packaging="Tape and Reel", Polarity=Positive, Pricing 1="1=0.47000, 10=0.35100, 100=0.21890, 500=0.14976, 1000=0.11520 (USD)", RoHS=Yes, Stock 1=101506, Supplier 1=Digi-Key, Width=1.7mm
VR1: "200 mA Low-Noise, High-PSRR Negative Output Low-Dropout Linear Regulators", Case/Package=SOT-23, Dropout Voltage=280mV, Input Bias Current=130uA, Manufacturer 1="Texas Instruments", Max Input Voltage=-2.7V, Max Operating Temperature=125°C, Max Output Current=200mA, Max Output Voltage=-2.5V, Max Power Dissipation=560mW, Min Current Limit=300mA, Min Input Voltage=-10V, Min Operating Temperature=-40°C, Output Voltage Accuracy=1%, Package Quantity=3000, Supplier Part Number 1=296-39479-1-ND, Accuracy=2%, ComponentLink1Description=http://www.mouser.com/ds/2/405/slvs346c-521947.pdf?src-supplier=Mouser, ComponentLink1URL=http://www.mouser.com/ds/2/405/slvs346c-521947.pdf?src-supplier=Mouser, ComponentLink2Description=http://components.arrow.com/part/dataview/0323_00141856?src-supplier=Arrow+Europe, ComponentLink2URL=http://components.arrow.com/part/dataview/0323_00141856?src-supplier=Arrow+Europe, ComponentLink3Description=http://www.ti.com/general/docs/lit/getliterature.tsp?genericPartNumber=TPS723&amp;&amp;fileType=pdf&src-supplier=Farnell, ComponentLink3URL=http://www.ti.com/general/docs/lit/getliterature.tsp?genericPartNumber=TPS723&amp;&amp;fileType=pdf&src-supplier=Farnell, ComponentLink4Description=http://www.ti.com/general/docs/lit/getliterature.tsp?genericPartNumber=TPS723&&fileType=pdf&src-supplier=Element14, ComponentLink4URL=http://www.ti.com/general/docs/lit/getliterature.tsp?genericPartNumber=TPS723&&fileType=pdf&src-supplier=Element14, ComponentLink5Description=http://www.ti.com/general/docs/lit/getliterature.tsp?genericPartNumber=TPS723&&fileType=pdf&src-supplier=Avnet+Asia, ComponentLink5URL=http://www.ti.com/general/docs/lit/getliterature.tsp?genericPartNumber=TPS723&&fileType=pdf&src-supplier=Avnet+Asia, ComponentLink6Description=http://www.ti.com/general/docs/lit/getliterature.tsp?genericPartNumber=TPS723&&fileType=pdf&src-supplier=Avnet, ComponentLink6URL=http://www.ti.com/general/docs/lit/getliterature.tsp?genericPartNumber=TPS723&&fileType=pdf&src-supplier=Avnet, ComponentLink7Description=http://www.ti.com/lit/ds/symlink/tps723.pdf?src-supplier=Digi-Key, ComponentLink7URL=http://www.ti.com/lit/ds/symlink/tps723.pdf?src-supplier=Digi-Key, ComponentLink8Description=http://www.ti.com/general/docs/lit/getliterature.tsp?genericPartNumber=TPS723&amp;&amp;fileType=pdf&src-supplier=Newark, ComponentLink8URL=http://www.ti.com/general/docs/lit/getliterature.tsp?genericPartNumber=TPS723&amp;&amp;fileType=pdf&src-supplier=Newark, ComponentLink9Description=http://focus.ti.com/lit/ds/symlink/tps72325.pdf?src-supplier=Avnet+Europe, ComponentLink9URL=http://focus.ti.com/lit/ds/symlink/tps72325.pdf?src-supplier=Avnet+Europe, ComponentLink10Description=http://components.arrow.com/part/dataview/40177093S9611537N7713?src-supplier=Arrow, ComponentLink10URL=http://components.arrow.com/part/dataview/40177093S9611537N7713?src-supplier=Arrow, ComponentLink11Description=http://www.ti.com/lit/ds/symlink/tps72301.pdf?src-supplier=Digi-Key, ComponentLink11URL=http://www.ti.com/lit/ds/symlink/tps72301.pdf?src-supplier=Digi-Key, Contact Plating=Tin,Matte, Lead Free="Lead Free", Manufacturer Part Number 1=TPS72325DBVR, Min Output Voltage=-2.5V, Nominal Output Voltage=-2.5V, Number of Outputs=1, Number of Pins=5, Number of Regulators=1, Output Current=200mA, Output Type=Fixed, Output Voltage=-2.5V, Packaging="Tape and Reel", Polarity=Negative, Power Dissipation=560mW, Pricing 1="1=2.81000, 10=2.52200, 100=2.02720, 500=1.66552, 1000=1.37999 (USD)", Quiescent Current=130uA, Radiation Hardening=No, REACH SVHC="No SVHC", RoHS=Yes, Stock 1=4645, Supplier 1=Digi-Key
WIFI1: "ESP8266 SMT MODULE", Case/Package=Module, Current - Receiving=56mA, Current - Transmitting=170mA, Frequency=2.4GHz, Manufacturer 1="Adafruit Industries", Max Operating Temperature=125°C, Min Operating Temperature=-40°C, Supplier Part Number 1=1528-1438-ND, ComponentLink1Description=https://www.mouser.com/ds/2/737/0A-ESP8266__Datasheet__EN_v4.3-1095239.pdf?src-supplier=Mouser, ComponentLink1URL=https://www.mouser.com/ds/2/737/0A-ESP8266__Datasheet__EN_v4.3-1095239.pdf?src-supplier=Mouser, ComponentLink2Description=https://www.adafruit.com/images/product-files/2471/0A-ESP8266__Datasheet__EN_v4.3.pdf?src-supplier=Digi-Key, ComponentLink2URL=https://www.adafruit.com/images/product-files/2471/0A-ESP8266__Datasheet__EN_v4.3.pdf?src-supplier=Digi-Key, Data Rate=72.2Mbps, Interface=I2C,SPI,UART, Manufacturer Part Number 1=2491, Mount="Surface Mount", Packaging=Bulk, Pricing 1="1=6.95000 (USD)", RoHS=Yes, Sensitivity=-91dBm, Stock 1=992, Supplier 1=Digi-Key
X1: "CRYSTAL 8.0000MHZ 18PF SMD", Case/Package=CSMD, ESR (Equivalent Series Resistance)=72R, Frequency=8MHz, Frequency Stability=20ppm, Load Capacitance=18pF, Manufacturer 1=Abracon, Max Operating Temperature=70°C, Min Operating Temperature=-20°C, Package Quantity=1000, Supplier Part Number 1=535-9628-1-ND, Accuracy=20ppm, ComponentLink1Description=https://datasheet.ciiva.com/7998/1682206-7998656.pdf?src-supplier=Element14, ComponentLink1URL=https://datasheet.ciiva.com/7998/1682206-7998656.pdf?src-supplier=Element14, ComponentLink2Description=https://datasheet.ciiva.com/4945/abmm2-40161-4945441.pdf?src-supplier=Mouser, ComponentLink2URL=https://datasheet.ciiva.com/4945/abmm2-40161-4945441.pdf?src-supplier=Mouser, ComponentLink3Description=https://datasheet.ciiva.com/3176/abmm2-3176155.pdf?src-supplier=Avnet, ComponentLink3URL=https://datasheet.ciiva.com/3176/abmm2-3176155.pdf?src-supplier=Avnet, ComponentLink4Description=https://datasheet.ciiva.com/855/abmm2-855405.pdf?src-supplier=Digi-Key, ComponentLink4URL=https://datasheet.ciiva.com/855/abmm2-855405.pdf?src-supplier=Digi-Key, ComponentLink5Description=https://datasheet.ciiva.com/855/abmm2-855406.pdf?src-supplier=Digi-Key, ComponentLink5URL=https://datasheet.ciiva.com/855/abmm2-855406.pdf?src-supplier=Digi-Key, ComponentLink6Description=https://datasheet.ciiva.com/855/abmm2-855407.pdf?src-supplier=Digi-Key, ComponentLink6URL=https://datasheet.ciiva.com/855/abmm2-855407.pdf?src-supplier=Digi-Key, Composition=Ceramic, Depth=3.6mm, Frequency Tolerance=20ppm, Height=0.047inch, Lead Free="Lead Free", Length=6mm, Manufacturer Part Number 1=ABMM2-8.000MHZ-E2-T, Number of Pins=4, Packaging="Tape and Reel", Pricing 1="1=0.97000, 10=0.86000, 50=0.80420, 100=0.71060, 500=0.67320 (USD)", REACH SVHC="No SVHC", RoHS=Yes, Series Resistance=72R, Stock 1=81649, Supplier 1=Digi-Key, Termination=SMD/SMT, Tolerance=20ppm, Width=3.6mm
ZIF1: "CONN FFC FPC 18POS 0.50MM R/A", Current Rating=500mA, Flammability Rating="UL94 V-0", Insulation Resistance=500MR, Manufacturer 1=Hirose, Max Operating Temperature=85°C, Min Operating Temperature=-55°C, Package Quantity=5000, Supplier Part Number 1=HFT418CT-ND, Voltage Rating=50V, Actuator Material=Nylon,Polyamide, ComponentLink1Description=https://datasheet.ciiva.com/46408/1693466-46408165.pdf?src-supplier=Element14, ComponentLink1URL=https://datasheet.ciiva.com/46408/1693466-46408165.pdf?src-supplier=Element14, Contact Material=Bronze, Contact Plating=Gold, Gender=Receptacle, Housing Material=Polymer, Manufacturer Part Number 1=FH34SRJ-18S-0.5SH(50), Mount="Surface Mount", Number of Contacts=18, Number of Positions=18, Number of Rows=1, Packaging="Tape and Reel", Pitch=0.02inch, Pricing 1="1=2.17000, 10=1.96700, 25=1.84680, 50=1.76660, 100=1.68630, 250=1.52572, 500=1.40526 (USD)", REACH SVHC="No SVHC", RoHS=Yes, Stock 1=1441, Supplier 1=Digi-Key, Termination=SMD/SMT, Wire/Cable Type="Flat Flex"

## Via types
v1: diameter 15.87, hole 11.81, Top Layer to Bottom Layer, 188 vias
v2: diameter 35.43, hole 35.43, Top Layer to Bottom Layer, 14 vias
v3: diameter 19.68, hole 7.87, Top Layer to Bottom Layer, 9 vias

## Nets (pads, with @x,y where several pads share a name; then routed paths per layer and width w, separated by ;. In a path a pad name is that pad's centre, name@x,y a point inside that pad or via, vN(x,y) a via of type N, cw(c..) or ccw(c..) an arc to the next point about the centre after c; other vN are vias at no path point)
1P: D2.1 R1.2 ZIF1.2 | length 684.6
  Top Layer w6: v1(41.34,950.79) 41.34,955.75 57.26,971.68 75.58,971.68 89.64,957.62 89.64,942.35 110.73,921.26 R1.2@120.08,921.26 129.43,921.26 150.18,942.01 150.18,954.74 167.88,972.44 179.13,972.44 291.48,1084.79 450.32,1084.79 493.97,1041.13 530.24,1041.13 538.43,1049.33 538.43,1064.02 ZIF1.2@541.34,1066.93
  Bottom Layer w6: v1(41.34,950.79) D2.1@41.34,981.41
2P: D3.5 R2.4 ZIF1.3 | length 1106.4
  Top Layer w6: R2.4@253.94,858.27 244.59,858.27 227.22,875.63 227.22,976.05 249.58,998.41 378.57,998.41 401.02,1020.86 529.65,1020.86 558.12,1049.33 558.12,1064.02 ZIF1.3@561.02,1066.93 v1@561.04,1119.14
  Layer 1 w6: v1(66.93,1095.47) 95.87,1124.41 553.77,1124.41 v1(561.05,1117.13)
  Bottom Layer w6: D3.5@66.93,1064.85 v1(66.93,1095.47)
3P: D3.1 R2.2 ZIF1.4 | length 1049.6
  Top Layer w6: R2.2@253.94,921.26 263.29,921.26 294.15,952.12 294.15,964.85 315.71,986.41 383.54,986.41 405.99,1008.86 537.4,1008.86 577.8,1049.26 577.8,1064.02 ZIF1.4@580.71,1066.93 v1(580.71,1107.28)
  Layer 1 w6: v1@42.53,1112.41 66.9,1112.41 90.9,1136.41 573.24,1136.41 581.69,1127.95 581.69,1108.27 v1(580.71,1107.28)
  Bottom Layer w6: D3.1@41.34,1141.85 v1(41.34,1111.22) v1@42.53,1112.41
4P: D4.5 R3.4 ZIF1.5 | length 949
  Top Layer w6: R3.4@387.8,858.27 378.45,858.27 361.08,875.63 361.08,940.66 361.08,964.85 370.64,974.41 388.51,974.41 408.57,994.47 539.99,994.47 555.31,1009.79 557.51,1012 574.01,1012 597.49,1035.48 597.49,1064.02 ZIF1.5@600.39,1066.93 v1(600.39,1117.13)
  Layer 1 w6: v1(180.12,1095.47) 267.72,1095.47 275.42,1087.77 335.45,1087.77 335.63,1087.6 589.57,1087.6 600.39,1098.43 v1(600.39,1117.13)
  Bottom Layer w6: D4.5@180.12,1064.85 v1(180.12,1095.47)
5P: D4.1 R3.2 ZIF1.6 | length 905.6
  Top Layer w6: R3.2@387.8,921.26 397.15,921.26 417.9,942.01 ; v1(620.08,1107.28) ZIF1.6@620.08,1066.93 620.08,1030.51 589.57,1000 562.99,1000 545.46,982.47 445.63,982.47 417.9,954.74 ; 417.9,942.01 417.9,954.74 ; 417.9,942.01 417.9,954.74
  Layer 1 w6: v1(154.53,1172.24) 178.3,1148.47 593,1148.47 620.08,1121.39 v1(620.08,1107.28)
  Bottom Layer w6: D4.1@154.53,1141.85 v1(154.53,1172.24)
6P: D5.5 R4.4 ZIF1.7 | length 833.3
  Top Layer w6: R4.4@521.65,858.27 512.3,858.27 494.94,875.63 494.94,964.85 500.56,970.47 550.52,970.47 568.05,988 607.09,988 639.76,1020.67 ZIF1.7@639.76,1066.93 v1(639.76,1117.13)
  Layer 1 w6: v1@295.28,1034.45 293.32,1036.4 293.32,1064.96 304.13,1075.77 304.31,1075.6 623.83,1075.6 639.76,1091.54 v1(639.76,1117.13)
  Bottom Layer w6: D5.5@293.31,1064.85 295.28,1062.89 v1@295.28,1034.45
  other v1: 293.5,1034.45
7P: D5.1 R4.2 ZIF1.8 | length 810.3
  Top Layer w6: R4.2@521.65,921.26 531,921.26 556.1,946.36 556.1,959.09 569.46,972.44 621.06,972.44 659.45,1010.83 ZIF1.8@659.45,1066.93 v1(659.45,1107.28)
  Layer 1 w6: v1(227.37,1165.41) 234.21,1172.24 627.95,1172.24 659.45,1140.75 v1(659.45,1107.28)
  Bottom Layer w6: v1(227.37,1165.41) 244.15,1165.41 D5.1@267.72,1141.85
8P: D6.5 R6.4 ZIF1.9 | length 570
  Top Layer w6: v1(679.13,1117.13) ZIF1.9@679.13,1066.93 678.15,1065.95 678.15,987.7 713.09,952.76 R6.4@722.44,952.76
  Layer 1 w6: v1(457.68,1043.31) 459.85,1041.13 617.25,1041.13 679.13,1103.02 v1(679.13,1117.13)
  Bottom Layer w6: D6.5@406.5,1064.85 406.5,1080.85 416.09,1090.44 416.09,1091.57 421.36,1096.85 442.81,1096.85 457.68,1081.98 v1(457.68,1043.31)
9P: D15.1 R20.1 ZIF1.10 | length 800.5
  Top Layer w6: v1(698.82,1107.28) ZIF1.10@698.82,1066.93 698.82,1015.5 752.95,961.37 v1(752.95,811.02) ; R20.1@856.3,858.27 857.12,857.45 857.12,841.7 v1(869.09,829.72)